# EAGLE board CT_schematic (EAGLE 7.6.0)

Size 100 x 80 mm. Coordinates in mm from the lower left corner, seen from the top.
Outline: 0,0 100,0 100,80 0,80 0,0
Copper layers (1*16): Top 0.035mm / dielectric 1.5mm / Bottom 0.035mm
Design rules "default": minimum track width 10mil, minimum drill 24mil, track to track 8mil, track to pad 8mil, pad to pad 8mil, via to via 8mil, smd to smd 8mil, copper to edge 40mil, drill to drill 8mil, minimum pad ring 10mil, minimum via ring 8mil, stop-mask expansion 4mil, vias tented up to drill 0mil, thermal gap 10mil

## Footprints (pad centres in the part's own frame; a part is rotated, then mirrored left to right if it is on the bottom)
C0603 = smd 0.8 x 0.8: 1 -0.762,0; 2 0.762,0
C0402 = smd 0.5 x 0.5: 1 -0.508,0; 2 0.508,0
C0805 = smd 1.2 x 1.3: 1 -1.016,0; 2 1.016,0
C1206 = smd 1.3 x 1.6: 1 -1.524,0; 2 1.524,0
C1210 = smd 1.2 x 2.5: 1 -1.524,0; 2 1.524,0
EXV-9H = smd 3.505 x 1.676: 1 -2.857,0; 2 2.857,0
PJ-037B_PACKAGE = drill 3.7 square: 1 12,0 | drill 3.2 square: 2 6,0
R0603 = smd 0.8 x 0.8: 1 -0.762,0; 2 0.762,0
WLCSP81 = smd 0.25 x 0.25: A1 -1.6,1.6; A2 -1.2,1.6; A3 -0.8,1.6; A4 -0.4,1.6; A5 0,1.6; A6 0.4,1.6; A7 0.8,1.6; A8 1.2,1.6; A9 1.6,1.6; B1 -1.6,1.2; B2 -1.2,1.2; B3 -0.8,1.2; B4 -0.4,1.2; B5 0,1.2; B6 0.4,1.2; B7 0.8,1.2; B8 1.2,1.2; B9 1.6,1.2; C1 -1.6,0.8; C2 -1.2,0.8; C3 -0.8,0.8; C4 -0.4,0.8; C5 0,0.8; C6 0.4,0.8; C7 0.8,0.8; C8 1.2,0.8; C9 1.6,0.8; D1 -1.6,0.4; D2 -1.2,0.4; D3 -0.8,0.4; D4 -0.4,0.4; D5 0,0.4; D6 0.4,0.4; D7 0.8,0.4; D8 1.2,0.4; D9 1.6,0.4; E1 -1.6,0; E2 -1.2,0; E3 -0.8,0; E4 -0.4,0; E5 0,0; E6 0.4,0; E7 0.8,0; E8 1.2,0; E9 1.6,0; F1 -1.6,-0.4; F2 -1.2,-0.4; F3 -0.8,-0.4; F4 -0.4,-0.4; F5 0,-0.4; F6 0.4,-0.4; F7 0.8,-0.4; F8 1.2,-0.4; F9 1.6,-0.4; G1 -1.6,-0.8; G2 -1.2,-0.8; G3 -0.8,-0.8; G4 -0.4,-0.8; G5 0,-0.8; G6 0.4,-0.8; G7 0.8,-0.8; G8 1.2,-0.8; G9 1.6,-0.8; H1 -1.6,-1.2; H2 -1.2,-1.2; H3 -0.8,-1.2; H4 -0.4,-1.2; H5 0,-1.2; H6 0.4,-1.2; H7 0.8,-1.2; H8 1.2,-1.2; H9 1.6,-1.2; J1 -1.6,-1.6; J2 -1.2,-1.6; J3 -0.8,-1.6; J4 -0.4,-1.6; J5 0,-1.6; J6 0.4,-1.6; J7 0.8,-1.6; J8 1.2,-1.6; J9 1.6,-1.6
SOIC-8 = smd 1.6 x 0.6: 1 -2.7,1.905 | smd 1.55 x 0.6: 2 -2.7,0.635; 3 -2.7,-0.635; 4 -2.7,-1.905; 5 2.7,-1.905; 6 2.7,-0.635; 7 2.7,0.635; 8 2.7,1.905
SSOP-28 = smd 1.5 x 0.4: 1 -3.625,4.225; 2 -3.625,3.575; 3 -3.625,2.925; 4 -3.625,2.275; 5 -3.625,1.625; 6 -3.625,0.975; 7 -3.625,0.325; 8 -3.625,-0.325; 9 -3.625,-0.975; 10 -3.625,-1.625; 11 -3.625,-2.275; 12 -3.625,-2.925; 13 -3.625,-3.575; 14 -3.625,-4.225; 15 3.625,-4.225; 16 3.625,-3.575; 17 3.625,-2.925; 18 3.625,-2.275; 19 3.625,-1.625; 20 3.625,-0.975; 21 3.625,-0.325; 22 3.625,0.325; 23 3.625,0.975; 24 3.625,1.625; 25 3.625,2.275; 26 3.625,2.925; 27 3.625,3.575; 28 3.625,4.225
FCI_10118193-0001LF = smd 0.4 x 1.35: 1 -1.3,2.675; 2 -0.65,2.675; 3 0,2.675; 4 0.65,2.675; 5 1.3,2.675 | smd 1.6 x 1.4: 6 -3.2,2.45; 7 3.2,2.45 | smd 1.9 x 1.9: 8 -1.2,0; 9 1.2,0 | hole 0.5: -3.3,0; 3.3,0
TST-110-05-T-D-RA = drill 1 pad 1.7 square: 1 0,0 | drill 1 pad 1.7: 2 0,2.54; 3 2.54,0; 4 2.54,2.54; 5 5.08,0; 6 5.08,2.54; 7 7.62,0; 8 7.62,2.54; 9 10.16,0; 10 10.16,2.54; 11 12.7,0; 12 12.7,2.54; 13 15.24,0; 14 15.24,2.54; 15 17.78,0; 16 17.78,2.54; 17 20.32,0; 18 20.32,2.54; 19 22.86,0; 20 22.86,2.54
XCVR_SPBTLE-RF = smd 1.6 x 1: 1 -6.75,0.33; 2 -6.75,-0.94; 3 -6.75,-2.21; 4 -6.75,-3.48; 5 -6.75,-4.75; 7 6.75,-4.75; 8 6.75,-3.48; 9 6.75,-2.21; 10 6.75,-0.94; 11 6.75,0.33 | smd 1 x 1.6: 6 -2.75,-5.75
MICRO_USB_AB = smd 0.4 x 1.35: 1 1.3,0.26; 2 0.65,0.26; 3 0,0.26; 4 -0.65,0.26; 5 -1.3,0.26 | drill 0.6 pad 0.95 long: 6 4.175,-2.54; 7 -4.175,-2.54 | drill 0.7 pad 1.1 long: 8 -2.225,0.46; 9 2.225,0.46
SOT143B = smd 1 x 0.7: 1 -0.75,-1 | smd 0.6 x 0.7: 2 0.95,-1; 3 0.95,1; 4 -0.95,1
ABLS-25.000MHZ-B2F-T = smd 5.6 x 2.8: 1 -3.81,0; 2 5.69,0
ASEK = smd 1.4 x 1: 1 -1.1,-0.8; 2 1.1,-0.8; 3 1.1,0.8; 4 -1.1,0.8
ASFL1 = smd 1.7 x 1.5: 1 -1.27,-1.1; 2 1.27,-1.1; 3 1.27,1.1; 4 -1.27,1.1
WSON-8 = smd 0.3 x 0.6: 1 -0.75,0; 2 0.05,0; 3 0.85,0; 4 1.65,0; 5 1.65,3.8; 6 0.85,3.8; 7 0.05,3.8; 8 -0.75,3.8 | smd 3 x 2.6: PAD 0.45,1.9
SON-6 = smd 0.55 x 0.3: 1 -0.355,0.5 | smd 0.52 x 0.3: 2 -0.37,0; 3 -0.37,-0.5; 4 0.37,-0.5; 5 0.37,0; 6 0.37,0.5
SW_4-1437565-2 = smd 1.4 x 2.1: 1 -2.23,4.55; 2 -2.23,-4.55; 3 2.23,4.55; 4 2.23,-4.55
LGM67K-G1J2-24-Z = smd 0.8 x 1.4: A -2,0; C 0,0
NC7SZ125M5X = smd 1.3 x 0.7: 1 -1.3,0.95; 2 -1.3,0; 3 -1.3,-0.95; 4 1.3,-0.95; 5 1.3,0.95

## Placement (x,y rotation side)
C1  1e-06  [C0603]  -27.94,69.85 0 top  (outside the outline)
C2  1e-07  [C0603]  -31.75,69.85 0 top  (outside the outline)
C3  1e-07  [C0603]  -35.56,69.85 0 top  (outside the outline)
C4  1e-07  [C0603]  -39.37,69.85 0 top  (outside the outline)
C5  1e-07  [C0603]  -43.18,69.85 0 top  (outside the outline)
C6  1e-07  [C0603]  -46.99,69.85 0 top  (outside the outline)
C7  4.7e-06  [C0603]  -24.13,69.85 0 top  (outside the outline)
C8  1e-07  [C0603]  -50.8,69.85 0 top  (outside the outline)
C9  1e-07  [C0603]  -54.61,69.85 0 top  (outside the outline)
C10  1e-07  [C0603]  -58.42,69.85 0 top  (outside the outline)
C11  1e-08  [C0603]  -62.23,69.85 0 top  (outside the outline)
C12  1e-06  [C0603]  -66.04,69.85 0 top  (outside the outline)
C13  1e-11  [C0402]  -38.1,74.93 0 top  (outside the outline)
C14  1e-11  [C0402]  -41.91,74.93 0 top  (outside the outline)
C15  1e-08  [C0402]  -45.72,74.93 0 top  (outside the outline)
C16  1e-07  [C0402]  -49.53,74.93 0 top  (outside the outline)
C17  4.7e-06  [C0805]  -40.64,58.42 0 top  (outside the outline)
C18  1e-07  [C0402]  -53.34,74.93 0 top  (outside the outline)
C19  1e-07  [C0402]  -57.15,74.93 0 top  (outside the outline)
C20  1e-07  [C0402]  -60.96,74.93 0 top  (outside the outline)
C21  1e-07  [C0402]  -64.77,74.93 0 top  (outside the outline)
C22  1e-06  [C0603]  -69.85,69.85 0 top  (outside the outline)
C23  1e-07  [C0402]  -68.58,74.93 0 top  (outside the outline)
C24  1e-08  [C0402]  -72.39,74.93 0 top  (outside the outline)
C25  1e-08  [C0402]  -15.24,80.01 0 top  (outside the outline)
C26  1e-08  [C0402]  -19.05,80.01 0 top  (outside the outline)
C27  1e-05  [C1206]  -16.51,58.42 0 top  (outside the outline)
C28  1e-05  [C1210]  -71.12,50.8 0 top  (outside the outline)
C29  1e-07  [C0402]  -22.86,80.01 0 top  (outside the outline)
C30  0.0001  [EXV-9H]  -17.78,52.07 0 top  (outside the outline)
C31  0.0001  [EXV-9H]  -29.21,52.07 0 top  (outside the outline)
C32  1e-08  [C0402]  -26.67,80.01 0 top  (outside the outline)
C33  1e-08  [C0402]  -30.48,80.01 0 top  (outside the outline)
C34  1e-08  [C0402]  -34.29,80.01 0 top  (outside the outline)
J1  PJ-037B  [PJ-037B_PACKAGE]  -58.42,7.62 0 top  (outside the outline)
R2  1000.0  [R0603]  -73.66,69.85 0 top  (outside the outline)
R4  4700.0  [R0603]  -15.24,74.93 0 top  (outside the outline)
R5  4700.0  [R0603]  -19.05,74.93 0 top  (outside the outline)
R6  10000.0  [R0603]  -66.04,58.42 0 top  (outside the outline)
R7  10000.0  [R0603]  -71.12,58.42 0 top  (outside the outline)
R8  10000.0  [R0603]  -15.24,64.77 0 top  (outside the outline)
R9  10000.0  [R0603]  -20.32,64.77 0 top  (outside the outline)
R10  4700.0  [R0603]  -22.86,74.93 0 top  (outside the outline)
R11  10000.0  [R0603]  -25.4,64.77 0 top  (outside the outline)
R12  10000.0  [R0603]  -30.48,64.77 0 top  (outside the outline)
R13  10000.0  [R0603]  -35.56,64.77 0 top  (outside the outline)
R14  10000.0  [R0603]  -40.64,64.77 0 top  (outside the outline)
R15  10000.0  [R0603]  -45.72,64.77 0 top  (outside the outline)
R16  10000.0  [R0603]  -50.8,64.77 0 top  (outside the outline)
R17  10000.0  [R0603]  -55.88,64.77 0 top  (outside the outline)
R18  10000.0  [R0603]  -60.96,64.77 0 top  (outside the outline)
R19  10000.0  [R0603]  -66.04,64.77 0 top  (outside the outline)
R20  100000.0  [R0603]  -45.72,58.42 0 top  (outside the outline)
R21  47000.0  [R0603]  -71.12,64.77 0 top  (outside the outline)
R22  100000.0  [R0603]  -50.8,58.42 0 top  (outside the outline)
R23  2231.0  [R0603]  -26.67,74.93 0 top  (outside the outline)
R24  1000.0  [R0603]  -30.48,74.93 0 top  (outside the outline)
R25  10000.0  [R0603]  -15.24,69.85 0 top  (outside the outline)
R26  10000.0  [R0603]  -20.32,69.85 0 top  (outside the outline)
R27  9100.0  [R0603]  -34.29,74.93 0 top  (outside the outline)
R28  680000.0  [R0603]  -55.88,58.42 0 top  (outside the outline)
R29  120000.0  [R0603]  -60.96,58.42 0 top  (outside the outline)
U1  STM32L476MEY6  [WLCSP81]  -53.34,34.29 0 top  (outside the outline)
U2  AT25128B-SSHL-T  [SOIC-8]  -44.45,22.86 0 top  (outside the outline)
U3  FT232RL-REEL  [SSOP-28]  -38.1,7.62 0 top  (outside the outline)
U4  10118193-0001LF  [FCI_10118193-0001LF]  -35.56,34.29 0 top  (outside the outline)
U5  TST-110-05-T-D-RA  [TST-110-05-T-D-RA]  -46.99,41.91 0 top  (outside the outline)
U6  SPBTLE-RF  [XCVR_SPBTLE-RF]  -21.59,10.16 0 top  (outside the outline)
U7  47590-0001  [MICRO_USB_AB]  -67.31,7.62 0 top  (outside the outline)
U8  prtr5v0u2ax  [SOT143B]  -46.99,80.01 0 top  (outside the outline)
U9  ABLS-25.000MHZ-B2F-T  [ABLS-25.000MHZ-B2F-T]  -48.26,52.07 0 top  (outside the outline)
U10  ASEK-32.768KHz-ECST  [ASEK]  -66.04,43.18 0 top  (outside the outline)
U11  ASFL1-12MHZ-NCS  [ASFL1]  -26.67,34.29 0 top  (outside the outline)
U12  LP3878SDX-ADJ/NOPB  [WSON-8]  -66.04,21.59 0 top  (outside the outline)
U13  TPS3895ADRYR  [SON-6]  -50.8,78.74 0 top  (outside the outline)
U14  4-1437565-2  [SW_4-1437565-2]  -27.94,24.13 0 top  (outside the outline)
U15  Q65110A2395  [LGM67K-G1J2-24-Z]  -59.69,52.07 0 top  (outside the outline)
U16  nc7sz125m5x  [NC7SZ125M5X]  -21.59,58.42 0 top  (outside the outline)
U17  nc7sz125m5x  [NC7SZ125M5X]  -27.94,58.42 0 top  (outside the outline)
U18  nc7sz125m5x  [NC7SZ125M5X]  -34.29,58.42 0 top  (outside the outline)

## Library data of the parts
C1-C34 J1 R2 R4-R29 U1-U18 = circuit_tree

## Nets
CLK_CRYSTAL_U1_D8: C13.1 U1.D8 U9.1
CLK_CRYSTAL_U1_D9: C14.1 U1.D9 U9.2
CLK_U1_C9: U1.C9 U10.3
CLK_U3_27: U3.27 U11.3
GND: C1.2 C2.2 C3.2 C4.2 C5.2 C6.2 C7.2 C8.2 C9.2 C10.2 C11.2 C12.2 C13.2 C14.2 C15.2 C16.2 C17.2 C18.2 C19.2 C20.2 C21.2 C22.2 C23.2 C24.2 C25.2 C26.2 C27.2 C28.2 C29.2 C30.2 C31.2 C32.2 C33.2 C34.2 J1.2 R2.2 R6.2 R12.2 R18.2 R20.2 R21.2 R24.2 R27.2 R29.2 U1.A8 U1.B1 U1.G9 U1.J2 U1.J9 U2.4 U3.7 U3.18 U3.21 U3.25 U3.26 U4.5 U4.6 U4.7 U4.8 U4.9 U5.4 U5.6 U5.8 U5.10 U5.12 U5.14 U5.16 U5.18 U5.20 U6.6 U7.5 U7.6 U7.7 U7.8 U7.9 U8.1 U10.2 U11.2 U12.3 U12.PAD U13.2 U15.C U16.2 U16.3 U17.1 U17.3 U18.1 U18.3
NET_U1_D7: R6.1 U1.D7
NET_U1_E9: R5.1 U1.E9 U18.4
NET_U1_J6: U15.A
NET_U1_J7: U14.3 U14.4
NET_U2_3: R7.1 U2.3
NET_U2_7: R9.1 U2.7
NET_U3_14: R11.1 U3.14
NET_U3_17: C18.1 U3.17
NET_U3_19: R12.1 U3.19
NET_U4_1: R10.1 U4.1
NET_U4_2: U3.16 U4.2
NET_U4_3: U3.15 U4.3
NET_U4_19: R10.2
NET_U5_19: R18.1 U5.19
NET_U6_11: R4.1 U6.11 U17.4
NET_U12_1: C26.1 U12.1
NET_U12_6: R23.2 R24.1 U12.6
NET_U12_8: R22.1 U12.8
NET_U13_1: R26.1 R27.1 U13.1
NET_U13_3: R28.2 R29.1 U13.3
NET_U13_4: R25.1 U13.4 U16.4 U17.2 U18.2
NET_U14_1: R2.1 U14.1 U14.2
PROC_GPIO_TO_U6_SPI_IRQ: R21.1 U1.A3 U6.4
PROC_LPUART1_CTS: U1.H2 U3.3
PROC_LPUART1_RTS: U1.H1 U3.11
PROC_LPUART1_RX: U1.F9 U3.1
PROC_LPUART1_TX: U1.F8 U3.5
PROC_SPI1_MISO: U1.H5 U6.8
PROC_SPI1_MOSI: U1.C7 U6.9
PROC_SPI1_NSS: R19.1 U1.G5 U6.10
PROC_SPI1_SCK: R20.1 U1.H6 U6.7
PROC_SPI2_MISO: U1.F7 U2.2
PROC_SPI2_MOSI: U1.E5 U2.5
PROC_SPI2_NSS: R8.1 U1.E8 U2.1
PROC_SPI2_SCK: U1.H3 U2.6
PROC_SYS_JTCK_SWCLK: R16.1 U1.B2 U5.9
PROC_SYS_JTDI: R14.1 U1.A2 U5.5
PROC_SYS_JTDO_SWO: U1.A6 U5.13
PROC_SYS_JTMS_SWDIO: R15.1 U1.C2 U5.7
PROC_SYS_JTRST: R13.1 U1.C6 U5.3
PROC_USB_OTG_FS_DM: U1.D1 U7.2 U8.3
PROC_USB_OTG_FS_DP: U1.C1 U7.3 U8.2
PROC_USB_OTG_FS_ID: U1.D2 U7.4
PROC_USB_OTG_FS_VBUS: U1.E3 U7.1 U8.4
RST_OUT_U5_SRESET_B: R17.1 U5.15 U16.1
VCC_S1_10V0: C27.1 C30.1 C31.1 J1.1 R22.2 U12.4
VCC_TIER1_3V3: C1.1 C2.1 C3.1 C4.1 C5.1 C6.1 C7.1 C8.1 C9.1 C10.1 C11.1 C12.1 C15.1 C16.1 C17.1 C19.1 C20.1 C21.1 C22.1 C23.1 C24.1 C25.1 C28.1 C29.1 C32.1 C33.1 C34.1 R4.2 R5.2 R7.2 R8.2 R9.2 R11.2 R13.2 R14.2 R15.2 R16.2 R17.2 R19.2 R23.1 R25.2 R26.2 R28.1 U1.A1 U1.A9 U1.B6 U1.B9 U1.E4 U1.G8 U1.H9 U1.J1 U1.J8 U2.8 U3.4 U3.20 U5.1 U5.2 U6.5 U10.4 U11.4 U12.5 U13.6 U16.5 U17.5 U18.5

## Tracks (layer width: path | path; a pad name or v marks a point on that pad's centre or on a via)
CLK_CRYSTAL_U1_D8  (2 unrouted)
CLK_CRYSTAL_U1_D9  (2 unrouted)
CLK_U1_C9  (1 unrouted)
CLK_U3_27  (1 unrouted)
GND  (87 unrouted)
NET_U1_D7  (1 unrouted)
NET_U1_E9  (2 unrouted)
NET_U1_J7  (1 unrouted)
NET_U2_3  (1 unrouted)
NET_U2_7  (1 unrouted)
NET_U3_14  (1 unrouted)
NET_U3_17  (1 unrouted)
NET_U3_19  (1 unrouted)
NET_U4_1  (1 unrouted)
NET_U4_2  (1 unrouted)
NET_U4_3  (1 unrouted)
NET_U5_19  (1 unrouted)
NET_U6_11  (2 unrouted)
NET_U12_1  (1 unrouted)
NET_U12_6  (2 unrouted)
NET_U12_8  (1 unrouted)
NET_U13_1  (2 unrouted)
NET_U13_3  (2 unrouted)
NET_U13_4  (4 unrouted)
NET_U14_1  (2 unrouted)
PROC_GPIO_TO_U6_SPI_IRQ  (2 unrouted)
PROC_LPUART1_CTS  (1 unrouted)
PROC_LPUART1_RTS  (1 unrouted)
PROC_LPUART1_RX  (1 unrouted)
PROC_LPUART1_TX  (1 unrouted)
PROC_SPI1_MISO  (1 unrouted)
PROC_SPI1_MOSI  (1 unrouted)
PROC_SPI1_NSS  (2 unrouted)
PROC_SPI1_SCK  (2 unrouted)
PROC_SPI2_MISO  (1 unrouted)
PROC_SPI2_MOSI  (1 unrouted)
PROC_SPI2_NSS  (2 unrouted)
PROC_SPI2_SCK  (1 unrouted)
PROC_SYS_JTCK_SWCLK  (2 unrouted)
PROC_SYS_JTDI  (2 unrouted)
PROC_SYS_JTDO_SWO  (1 unrouted)
PROC_SYS_JTMS_SWDIO  (2 unrouted)
PROC_SYS_JTRST  (2 unrouted)
PROC_USB_OTG_FS_DM  (2 unrouted)
PROC_USB_OTG_FS_DP  (2 unrouted)
PROC_USB_OTG_FS_ID  (1 unrouted)
PROC_USB_OTG_FS_VBUS  (2 unrouted)
RST_OUT_U5_SRESET_B  (2 unrouted)
VCC_S1_10V0  (5 unrouted)
VCC_TIER1_3V3  (64 unrouted)